# EAGLE board MicroViewUSB-GiantPanel-v02 (EAGLE 6.5.0), part 1 of 7
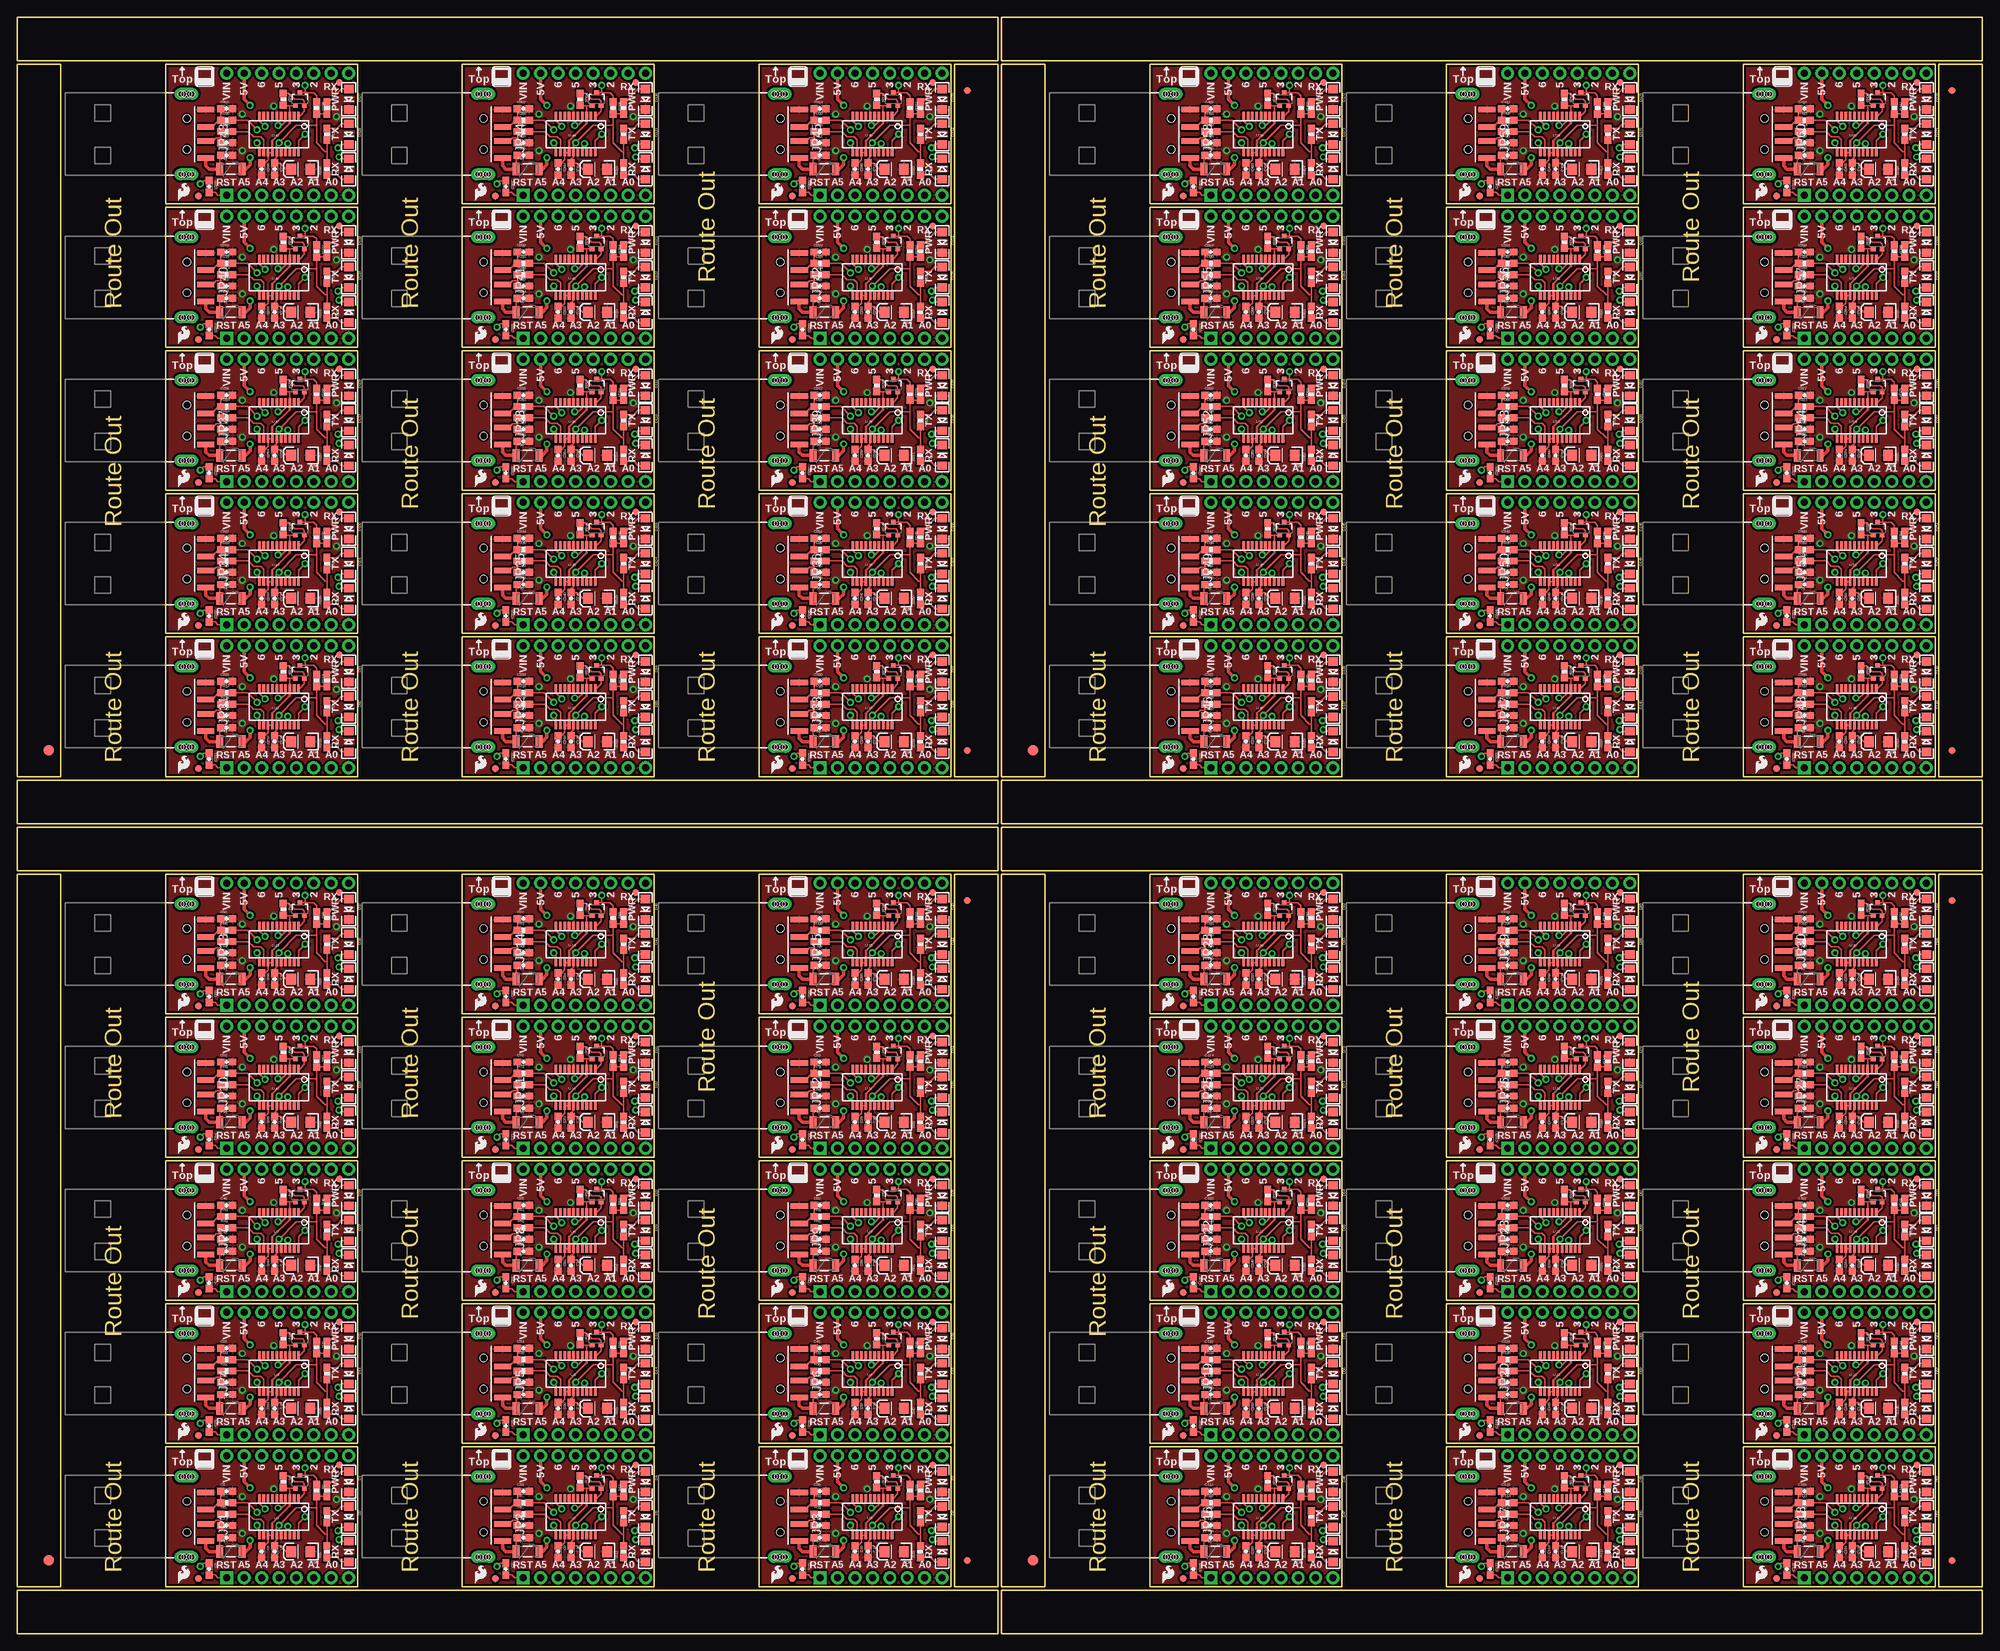
[diagram p0: board, top side]
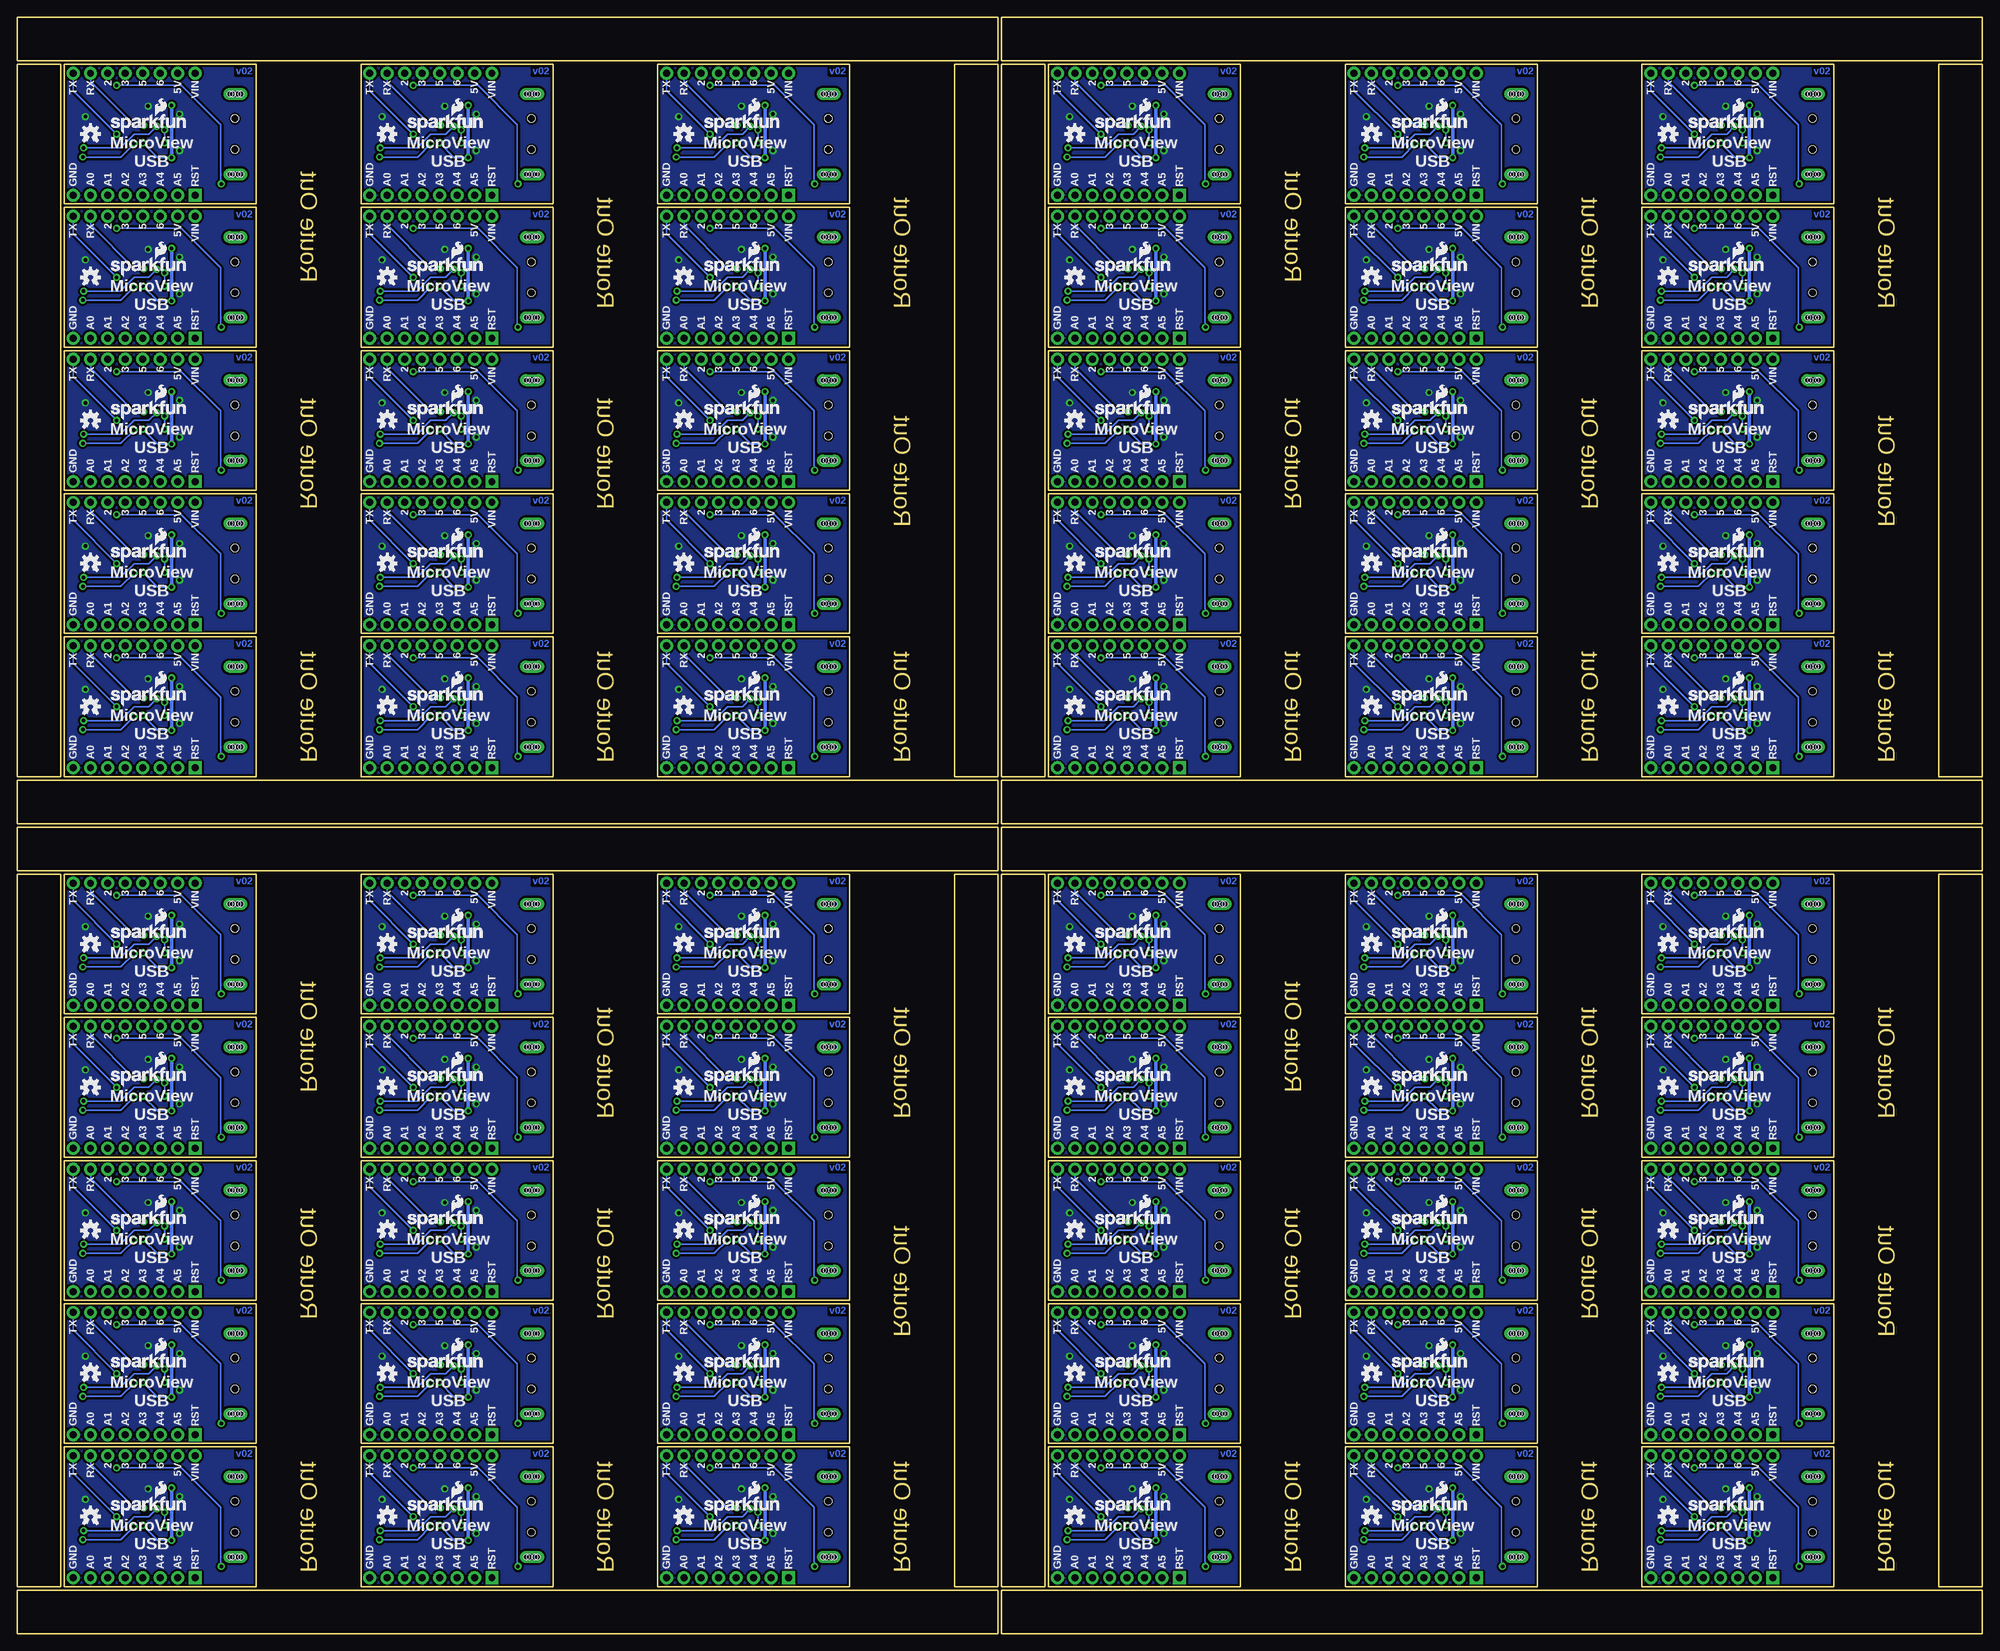
[diagram p1: board, bottom side, seen from below]

Size 286 x 235.2 mm. Coordinates in mm from the lower left corner, seen from the top.
Outline: 304 segments
Copper layers (1*16): Top 0.035mm / dielectric 1.5mm / Bottom 0.035mm
Design rules "SparkFun-2-layer": minimum track width 7mil, minimum drill 15mil, track to track 8mil, track to pad 8mil, pad to pad 8mil, via to via 8mil, smd to smd 8mil, copper to edge 8mil, drill to drill 8mil, minimum pad ring 12mil, minimum via ring 10mil, stop-mask expansion 4mil, vias tented up to drill 20mil, thermal gap 10mil
Net classes: 0 default: width 0.152 mm, drill 0.305 mm, clearance 0.152 mm

## Footprints (pad centres in the part's own frame; a part is rotated, then mirrored left to right if it is on the bottom)
0603-CAP = smd 1.1 x 1: 1 -0.85,0; 2 0.85,0
EIA3216 = smd 1.4 x 1.6: A 1.4,0; C -1.4,0
LED-1206 = smd 1.2 x 1.4: A -1.5,0; C 1.5,0
FIDUCIAL-1.5X3 = smd 1.5 x 1.5: 1 0,0
FIDUCIAL-1X2 = smd 1 x 1: 1 0,0
PTC-1206-WIDE = smd 1 x 1.8: 1 -1.654,0; 2 1.654,0
MV-DIP16-NODIMENSION = drill 1.016 pad 1.88 square: 1 0,0 | drill 1.016 pad 1.88: 2 2.54,0; 3 5.08,0; 4 7.62,0; 5 10.16,0; 6 12.7,0; 7 15.24,0; 8 17.78,0; 9 17.78,17.78; 10 15.24,17.78; 11 12.7,17.78; 12 10.16,17.78; 13 7.62,17.78; 14 5.08,17.78; 15 2.54,17.78; 16 0,17.78
USB-A-SMT-MALE = smd 0.8 x 2.5: D+1 1.027,-5.87; D-1 -1.027,-5.87; GND1 3.551,-5.87; VBUS1 -3.5,-5.87 | drill 0.8 pad 1.778 long: P$1 5.85,-3.05; P$3 -5.85,-3.05 | hole 1.1: 2.25,-3.12; -2.25,-3.12 | hole 0.8: -5.85,-3.45; -5.85,-3.85; -5.85,-2.65; -5.85,-2.25; 5.85,-3.45; 5.85,-3.85; 5.85,-2.65; 5.85,-2.25
SOT323 = smd 0.7 x 0.7: 1 -0.65,-0.925; 2 0.65,-0.925; 3 0,0.925
0603-RES = smd 1.1 x 1: 1 -0.85,0; 2 0.85,0
SSOP20_L = smd 0.381 x 1.143: 1 -2.857,-2.68; 2 -2.223,-2.68; 3 -1.587,-2.68; 4 -0.953,-2.68; 5 -0.318,-2.68; 6 0.318,-2.68; 7 0.953,-2.68; 8 1.587,-2.68; 9 2.223,-2.68; 10 2.857,-2.68; 11 2.857,2.68; 12 2.223,2.68; 13 1.587,2.68; 14 0.953,2.68; 15 0.318,2.68; 16 -0.318,2.68; 17 -0.953,2.68; 18 -1.587,2.68; 19 -2.223,2.68; 20 -2.857,2.68

## Placement (x,y rotation side)
C1  0.1uF  [0603-CAP]  30.48,13.97 0 top
C2  47pF  [0603-CAP]  30.48,15.75 0 top
C3  47pF  [0603-CAP]  30.48,20.7 0 top
C4  10uF  [EIA3216]  41.27,11.94 180 top
C5  0.1uF  [0603-CAP]  37.47,11.94 270 top
C6  0.1uF  [0603-CAP]  35.56,11.94 270 top
C7  0.1uF  [0603-CAP]  27.94,9.4 270 top
C8  0.1uF  [0603-CAP]  71.12,9.4 270 top
C9  0.1uF  [0603-CAP]  78.74,11.94 270 top
C10  0.1uF  [0603-CAP]  80.64,11.94 270 top
C11  0.1uF  [0603-CAP]  73.66,13.97 0 top
C12  47pF  [0603-CAP]  73.66,15.75 0 top
C13  47pF  [0603-CAP]  73.66,20.7 0 top
C14  10uF  [EIA3216]  84.45,11.94 180 top
C15  0.1uF  [0603-CAP]  114.3,9.4 270 top
C16  0.1uF  [0603-CAP]  121.92,11.94 270 top
C17  0.1uF  [0603-CAP]  123.83,11.94 270 top
C18  0.1uF  [0603-CAP]  116.84,13.97 0 top
C19  47pF  [0603-CAP]  116.84,15.75 0 top
C20  47pF  [0603-CAP]  116.84,20.7 0 top
C21  10uF  [EIA3216]  127.64,11.94 180 top
C22  0.1uF  [0603-CAP]  27.94,30.23 270 top
C23  0.1uF  [0603-CAP]  35.56,32.77 270 top
C24  0.1uF  [0603-CAP]  37.47,32.77 270 top
C25  0.1uF  [0603-CAP]  30.48,34.8 0 top
C26  47pF  [0603-CAP]  30.48,36.58 0 top
C27  47pF  [0603-CAP]  30.48,41.53 0 top
C28  10uF  [EIA3216]  41.27,32.77 180 top
C29  0.1uF  [0603-CAP]  71.12,30.23 270 top
C30  0.1uF  [0603-CAP]  78.74,32.77 270 top
C31  0.1uF  [0603-CAP]  80.64,32.77 270 top
C32  0.1uF  [0603-CAP]  73.66,34.8 0 top
C33  47pF  [0603-CAP]  73.66,36.58 0 top
C34  47pF  [0603-CAP]  73.66,41.53 0 top
C35  10uF  [EIA3216]  84.45,32.77 180 top
C36  0.1uF  [0603-CAP]  114.3,30.23 270 top
C37  0.1uF  [0603-CAP]  121.92,32.77 270 top
C38  0.1uF  [0603-CAP]  123.83,32.77 270 top
C39  0.1uF  [0603-CAP]  116.84,34.8 0 top
C40  47pF  [0603-CAP]  116.84,36.58 0 top
C41  47pF  [0603-CAP]  116.84,41.53 0 top
C42  10uF  [EIA3216]  127.64,32.77 180 top
C43  0.1uF  [0603-CAP]  27.94,51.05 270 top
C44  0.1uF  [0603-CAP]  35.56,53.59 270 top
C45  0.1uF  [0603-CAP]  37.47,53.59 270 top
C46  0.1uF  [0603-CAP]  30.48,55.63 0 top
C47  47pF  [0603-CAP]  30.48,57.4 0 top
C48  47pF  [0603-CAP]  30.48,62.36 0 top
C49  10uF  [EIA3216]  41.27,53.59 180 top
C50  0.1uF  [0603-CAP]  71.12,51.05 270 top
C51  0.1uF  [0603-CAP]  78.74,53.59 270 top
C52  0.1uF  [0603-CAP]  80.64,53.59 270 top
C53  0.1uF  [0603-CAP]  73.66,55.63 0 top
C54  47pF  [0603-CAP]  73.66,57.4 0 top
C55  47pF  [0603-CAP]  73.66,62.36 0 top
C56  10uF  [EIA3216]  84.45,53.59 180 top
C57  0.1uF  [0603-CAP]  114.3,51.05 270 top
C58  0.1uF  [0603-CAP]  121.92,53.59 270 top
C59  0.1uF  [0603-CAP]  123.83,53.59 270 top
C60  0.1uF  [0603-CAP]  116.84,55.63 0 top
C61  47pF  [0603-CAP]  116.84,57.4 0 top
C62  47pF  [0603-CAP]  116.84,62.36 0 top
C63  10uF  [EIA3216]  127.64,53.59 180 top
C64  0.1uF  [0603-CAP]  27.94,71.88 270 top
C65  0.1uF  [0603-CAP]  35.56,74.42 270 top
C66  0.1uF  [0603-CAP]  37.47,74.42 270 top
C67  0.1uF  [0603-CAP]  30.48,76.45 0 top
C68  47pF  [0603-CAP]  30.48,78.23 0 top
C69  47pF  [0603-CAP]  30.48,83.19 0 top
C70  10uF  [EIA3216]  41.27,74.42 180 top
C71  0.1uF  [0603-CAP]  71.12,71.88 270 top
C72  0.1uF  [0603-CAP]  78.74,74.42 270 top
C73  0.1uF  [0603-CAP]  80.64,74.42 270 top
C74  0.1uF  [0603-CAP]  73.66,76.45 0 top
C75  47pF  [0603-CAP]  73.66,78.23 0 top
C76  47pF  [0603-CAP]  73.66,83.19 0 top
C77  10uF  [EIA3216]  84.45,74.42 180 top
C78  0.1uF  [0603-CAP]  114.3,71.88 270 top
C79  0.1uF  [0603-CAP]  121.92,74.42 270 top
C80  0.1uF  [0603-CAP]  123.83,74.42 270 top
C81  0.1uF  [0603-CAP]  116.84,76.45 0 top
C82  47pF  [0603-CAP]  116.84,78.23 0 top
C83  47pF  [0603-CAP]  116.84,83.19 0 top
C84  10uF  [EIA3216]  127.64,74.42 180 top
C85  0.1uF  [0603-CAP]  27.94,92.71 270 top
C86  0.1uF  [0603-CAP]  35.56,95.25 270 top
C87  0.1uF  [0603-CAP]  37.47,95.25 270 top
C88  0.1uF  [0603-CAP]  30.48,97.28 0 top
C89  47pF  [0603-CAP]  30.48,99.06 0 top
C90  47pF  [0603-CAP]  30.48,104.01 0 top
C91  10uF  [EIA3216]  41.27,95.25 180 top
C92  0.1uF  [0603-CAP]  71.12,92.71 270 top
C93  0.1uF  [0603-CAP]  78.74,95.25 270 top
C94  0.1uF  [0603-CAP]  80.64,95.25 270 top
C95  0.1uF  [0603-CAP]  73.66,97.28 0 top
C96  47pF  [0603-CAP]  73.66,99.06 0 top
C97  47pF  [0603-CAP]  73.66,104.01 0 top
C98  10uF  [EIA3216]  84.45,95.25 180 top
C99  0.1uF  [0603-CAP]  114.3,92.71 270 top
C100  0.1uF  [0603-CAP]  121.92,95.25 270 top
C101  0.1uF  [0603-CAP]  123.83,95.25 270 top
C102  0.1uF  [0603-CAP]  116.84,97.28 0 top
C103  47pF  [0603-CAP]  116.84,99.06 0 top
C104  47pF  [0603-CAP]  116.84,104.01 0 top
C105  10uF  [EIA3216]  127.64,95.25 180 top
C106  0.1uF  [0603-CAP]  171.2,9.4 270 top
C107  0.1uF  [0603-CAP]  178.82,11.94 270 top
C108  0.1uF  [0603-CAP]  180.72,11.94 270 top
C109  0.1uF  [0603-CAP]  173.74,13.97 0 top
C110  47pF  [0603-CAP]  173.74,15.75 0 top
C111  47pF  [0603-CAP]  173.74,20.7 0 top
C112  10uF  [EIA3216]  184.53,11.94 180 top
C113  0.1uF  [0603-CAP]  214.38,9.4 270 top
C114  0.1uF  [0603-CAP]  222,11.94 270 top
C115  0.1uF  [0603-CAP]  223.9,11.94 270 top
C116  0.1uF  [0603-CAP]  216.92,13.97 0 top
C117  47pF  [0603-CAP]  216.92,15.75 0 top
C118  47pF  [0603-CAP]  216.92,20.7 0 top
C119  10uF  [EIA3216]  227.71,11.94 180 top
C120  0.1uF  [0603-CAP]  257.56,9.4 270 top
C121  0.1uF  [0603-CAP]  265.18,11.94 270 top
C122  0.1uF  [0603-CAP]  267.08,11.94 270 top
C123  0.1uF  [0603-CAP]  260.1,13.97 0 top
C124  47pF  [0603-CAP]  260.1,15.75 0 top
C125  47pF  [0603-CAP]  260.1,20.7 0 top
C126  10uF  [EIA3216]  270.89,11.94 180 top
C127  0.1uF  [0603-CAP]  171.2,30.23 270 top
C128  0.1uF  [0603-CAP]  178.82,32.77 270 top
C129  0.1uF  [0603-CAP]  180.72,32.77 270 top
C130  0.1uF  [0603-CAP]  173.74,34.8 0 top
C131  47pF  [0603-CAP]  173.74,36.58 0 top
C132  47pF  [0603-CAP]  173.74,41.53 0 top
C133  10uF  [EIA3216]  184.53,32.77 180 top
C134  0.1uF  [0603-CAP]  214.38,30.23 270 top
C135  0.1uF  [0603-CAP]  222,32.77 270 top
C136  0.1uF  [0603-CAP]  223.9,32.77 270 top
C137  0.1uF  [0603-CAP]  216.92,34.8 0 top
C138  47pF  [0603-CAP]  216.92,36.58 0 top
C139  47pF  [0603-CAP]  216.92,41.53 0 top
C140  10uF  [EIA3216]  227.71,32.77 180 top
C141  0.1uF  [0603-CAP]  257.56,30.23 270 top
C142  0.1uF  [0603-CAP]  265.18,32.77 270 top
C143  0.1uF  [0603-CAP]  267.08,32.77 270 top
C144  0.1uF  [0603-CAP]  260.1,34.8 0 top
C145  47pF  [0603-CAP]  260.1,36.58 0 top
C146  47pF  [0603-CAP]  260.1,41.53 0 top
C147  10uF  [EIA3216]  270.89,32.77 180 top
C148  0.1uF  [0603-CAP]  171.2,51.05 270 top
C149  0.1uF  [0603-CAP]  178.82,53.59 270 top
C150  0.1uF  [0603-CAP]  180.72,53.59 270 top
C151  0.1uF  [0603-CAP]  173.74,55.63 0 top
C152  47pF  [0603-CAP]  173.74,57.4 0 top
C153  47pF  [0603-CAP]  173.74,62.36 0 top
C154  10uF  [EIA3216]  184.53,53.59 180 top
C155  0.1uF  [0603-CAP]  214.38,51.05 270 top
C156  0.1uF  [0603-CAP]  222,53.59 270 top
C157  0.1uF  [0603-CAP]  223.9,53.59 270 top
C158  0.1uF  [0603-CAP]  216.92,55.63 0 top
C159  47pF  [0603-CAP]  216.92,57.4 0 top
C160  47pF  [0603-CAP]  216.92,62.36 0 top
C161  10uF  [EIA3216]  227.71,53.59 180 top
C162  0.1uF  [0603-CAP]  257.56,51.05 270 top
C163  0.1uF  [0603-CAP]  265.18,53.59 270 top
C164  0.1uF  [0603-CAP]  267.08,53.59 270 top
C165  0.1uF  [0603-CAP]  260.1,55.63 0 top
C166  47pF  [0603-CAP]  260.1,57.4 0 top
C167  47pF  [0603-CAP]  260.1,62.36 0 top
C168  10uF  [EIA3216]  270.89,53.59 180 top
C169  0.1uF  [0603-CAP]  171.2,71.88 270 top
C170  0.1uF  [0603-CAP]  178.82,74.42 270 top
C171  0.1uF  [0603-CAP]  180.72,74.42 270 top
C172  0.1uF  [0603-CAP]  173.74,76.45 0 top
C173  47pF  [0603-CAP]  173.74,78.23 0 top
C174  47pF  [0603-CAP]  173.74,83.19 0 top
C175  10uF  [EIA3216]  184.53,74.42 180 top
C176  0.1uF  [0603-CAP]  214.38,71.88 270 top
C177  0.1uF  [0603-CAP]  222,74.42 270 top
C178  0.1uF  [0603-CAP]  223.9,74.42 270 top
C179  0.1uF  [0603-CAP]  216.92,76.45 0 top
C180  47pF  [0603-CAP]  216.92,78.23 0 top
C181  47pF  [0603-CAP]  216.92,83.19 0 top
C182  10uF  [EIA3216]  227.71,74.42 180 top
C183  0.1uF  [0603-CAP]  257.56,71.88 270 top
C184  0.1uF  [0603-CAP]  265.18,74.42 270 top
C185  0.1uF  [0603-CAP]  267.08,74.42 270 top
C186  0.1uF  [0603-CAP]  260.1,76.45 0 top
C187  47pF  [0603-CAP]  260.1,78.23 0 top
C188  47pF  [0603-CAP]  260.1,83.19 0 top
C189  10uF  [EIA3216]  270.89,74.42 180 top
C190  0.1uF  [0603-CAP]  171.2,92.71 270 top
C191  0.1uF  [0603-CAP]  178.82,95.25 270 top
C192  0.1uF  [0603-CAP]  180.72,95.25 270 top
C193  0.1uF  [0603-CAP]  173.74,97.28 0 top
C194  47pF  [0603-CAP]  173.74,99.06 0 top
C195  47pF  [0603-CAP]  173.74,104.01 0 top
C196  10uF  [EIA3216]  184.53,95.25 180 top
C197  0.1uF  [0603-CAP]  214.38,92.71 270 top
C198  0.1uF  [0603-CAP]  222,95.25 270 top
C199  0.1uF  [0603-CAP]  223.9,95.25 270 top
C200  0.1uF  [0603-CAP]  216.92,97.28 0 top
C201  47pF  [0603-CAP]  216.92,99.06 0 top
C202  47pF  [0603-CAP]  216.92,104.01 0 top
C203  10uF  [EIA3216]  227.71,95.25 180 top
C204  0.1uF  [0603-CAP]  257.56,92.71 270 top
C205  0.1uF  [0603-CAP]  265.18,95.25 270 top
C206  0.1uF  [0603-CAP]  267.08,95.25 270 top
C207  0.1uF  [0603-CAP]  260.1,97.28 0 top
C208  47pF  [0603-CAP]  260.1,99.06 0 top
C209  47pF  [0603-CAP]  260.1,104.01 0 top
C210  10uF  [EIA3216]  270.89,95.25 180 top
C211  0.1uF  [0603-CAP]  27.94,127.25 270 top
C212  0.1uF  [0603-CAP]  35.56,129.79 270 top
C213  0.1uF  [0603-CAP]  37.47,129.79 270 top
C214  0.1uF  [0603-CAP]  30.48,131.83 0 top
C215  47pF  [0603-CAP]  30.48,133.6 0 top
C216  47pF  [0603-CAP]  30.48,138.56 0 top
C217  10uF  [EIA3216]  41.27,129.79 180 top
C218  0.1uF  [0603-CAP]  71.12,127.25 270 top
C219  0.1uF  [0603-CAP]  78.74,129.79 270 top
C220  0.1uF  [0603-CAP]  80.64,129.79 270 top
C221  0.1uF  [0603-CAP]  73.66,131.83 0 top
C222  47pF  [0603-CAP]  73.66,133.6 0 top
C223  47pF  [0603-CAP]  73.66,138.56 0 top
C224  10uF  [EIA3216]  84.45,129.79 180 top
C225  0.1uF  [0603-CAP]  114.3,127.25 270 top
C226  0.1uF  [0603-CAP]  121.92,129.79 270 top
C227  0.1uF  [0603-CAP]  123.83,129.79 270 top
C228  0.1uF  [0603-CAP]  116.84,131.83 0 top
C229  47pF  [0603-CAP]  116.84,133.6 0 top
C230  47pF  [0603-CAP]  116.84,138.56 0 top
C231  10uF  [EIA3216]  127.64,129.79 180 top
C232  0.1uF  [0603-CAP]  27.94,148.08 270 top
C233  0.1uF  [0603-CAP]  35.56,150.62 270 top
C234  0.1uF  [0603-CAP]  37.47,150.62 270 top
C235  0.1uF  [0603-CAP]  30.48,152.65 0 top
C236  47pF  [0603-CAP]  30.48,154.43 0 top
C237  47pF  [0603-CAP]  30.48,159.38 0 top
C238  10uF  [EIA3216]  41.27,150.62 180 top
C239  0.1uF  [0603-CAP]  71.12,148.08 270 top
C240  0.1uF  [0603-CAP]  78.74,150.62 270 top
C241  0.1uF  [0603-CAP]  80.64,150.62 270 top
C242  0.1uF  [0603-CAP]  73.66,152.65 0 top
C243  47pF  [0603-CAP]  73.66,154.43 0 top
C244  47pF  [0603-CAP]  73.66,159.38 0 top
C245  10uF  [EIA3216]  84.45,150.62 180 top
C246  0.1uF  [0603-CAP]  114.3,148.08 270 top
C247  0.1uF  [0603-CAP]  121.92,150.62 270 top
C248  0.1uF  [0603-CAP]  123.83,150.62 270 top
C249  0.1uF  [0603-CAP]  116.84,152.65 0 top
C250  47pF  [0603-CAP]  116.84,154.43 0 top
C251  47pF  [0603-CAP]  116.84,159.38 0 top
C252  10uF  [EIA3216]  127.64,150.62 180 top
C253  0.1uF  [0603-CAP]  27.94,168.91 270 top
C254  0.1uF  [0603-CAP]  35.56,171.45 270 top
C255  0.1uF  [0603-CAP]  37.47,171.45 270 top
C256  0.1uF  [0603-CAP]  30.48,173.48 0 top
C257  47pF  [0603-CAP]  30.48,175.26 0 top
C258  47pF  [0603-CAP]  30.48,180.21 0 top
C259  10uF  [EIA3216]  41.27,171.45 180 top
C260  0.1uF  [0603-CAP]  71.12,168.91 270 top
C261  0.1uF  [0603-CAP]  78.74,171.45 270 top
C262  0.1uF  [0603-CAP]  80.64,171.45 270 top
C263  0.1uF  [0603-CAP]  73.66,173.48 0 top
C264  47pF  [0603-CAP]  73.66,175.26 0 top
C265  47pF  [0603-CAP]  73.66,180.21 0 top
C266  10uF  [EIA3216]  84.45,171.45 180 top
C267  0.1uF  [0603-CAP]  114.3,168.91 270 top
C268  0.1uF  [0603-CAP]  121.92,171.45 270 top
C269  0.1uF  [0603-CAP]  123.83,171.45 270 top
C270  0.1uF  [0603-CAP]  116.84,173.48 0 top
C271  47pF  [0603-CAP]  116.84,175.26 0 top
C272  47pF  [0603-CAP]  116.84,180.21 0 top
C273  10uF  [EIA3216]  127.64,171.45 180 top
C274  0.1uF  [0603-CAP]  27.94,189.74 270 top
C275  0.1uF  [0603-CAP]  35.56,192.28 270 top
C276  0.1uF  [0603-CAP]  37.47,192.28 270 top
C277  0.1uF  [0603-CAP]  30.48,194.31 0 top
C278  47pF  [0603-CAP]  30.48,196.09 0 top
C279  47pF  [0603-CAP]  30.48,201.04 0 top
C280  10uF  [EIA3216]  41.27,192.28 180 top
C281  0.1uF  [0603-CAP]  71.12,189.74 270 top
C282  0.1uF  [0603-CAP]  78.74,192.28 270 top
C283  0.1uF  [0603-CAP]  80.64,192.28 270 top
C284  0.1uF  [0603-CAP]  73.66,194.31 0 top
C285  47pF  [0603-CAP]  73.66,196.09 0 top
C286  47pF  [0603-CAP]  73.66,201.04 0 top
C287  10uF  [EIA3216]  84.45,192.28 180 top
C288  0.1uF  [0603-CAP]  114.3,189.74 270 top
C289  0.1uF  [0603-CAP]  121.92,192.28 270 top
C290  0.1uF  [0603-CAP]  123.83,192.28 270 top
C291  0.1uF  [0603-CAP]  116.84,194.31 0 top
C292  47pF  [0603-CAP]  116.84,196.09 0 top
C293  47pF  [0603-CAP]  116.84,201.04 0 top
C294  10uF  [EIA3216]  127.64,192.28 180 top
C295  0.1uF  [0603-CAP]  27.94,210.57 270 top
C296  0.1uF  [0603-CAP]  35.56,213.11 270 top
C297  0.1uF  [0603-CAP]  37.47,213.11 270 top
C298  0.1uF  [0603-CAP]  30.48,215.14 0 top
C299  47pF  [0603-CAP]  30.48,216.92 0 top
C300  47pF  [0603-CAP]  30.48,221.87 0 top
C301  10uF  [EIA3216]  41.27,213.11 180 top
C302  0.1uF  [0603-CAP]  71.12,210.57 270 top
C303  0.1uF  [0603-CAP]  78.74,213.11 270 top
C304  0.1uF  [0603-CAP]  80.64,213.11 270 top
C305  0.1uF  [0603-CAP]  73.66,215.14 0 top
C306  47pF  [0603-CAP]  73.66,216.92 0 top
C307  47pF  [0603-CAP]  73.66,221.87 0 top
C308  10uF  [EIA3216]  84.45,213.11 180 top
C309  0.1uF  [0603-CAP]  114.3,210.57 270 top
C310  0.1uF  [0603-CAP]  121.92,213.11 270 top
C311  0.1uF  [0603-CAP]  123.83,213.11 270 top
C312  0.1uF  [0603-CAP]  116.84,215.14 0 top
C313  47pF  [0603-CAP]  116.84,216.92 0 top
C314  47pF  [0603-CAP]  116.84,221.87 0 top
C315  10uF  [EIA3216]  127.64,213.11 180 top
C316  0.1uF  [0603-CAP]  171.2,127.25 270 top
C317  0.1uF  [0603-CAP]  178.82,129.79 270 top
C318  0.1uF  [0603-CAP]  180.72,129.79 270 top
C319  0.1uF  [0603-CAP]  173.74,131.83 0 top
C320  47pF  [0603-CAP]  173.74,133.6 0 top
C321  47pF  [0603-CAP]  173.74,138.56 0 top
C322  10uF  [EIA3216]  184.53,129.79 180 top
C323  0.1uF  [0603-CAP]  214.38,127.25 270 top
C324  0.1uF  [0603-CAP]  222,129.79 270 top
C325  0.1uF  [0603-CAP]  223.9,129.79 270 top
C326  0.1uF  [0603-CAP]  216.92,131.83 0 top
C327  47pF  [0603-CAP]  216.92,133.6 0 top
C328  47pF  [0603-CAP]  216.92,138.56 0 top
C329  10uF  [EIA3216]  227.71,129.79 180 top
C330  0.1uF  [0603-CAP]  257.56,127.25 270 top
C331  0.1uF  [0603-CAP]  265.18,129.79 270 top
C332  0.1uF  [0603-CAP]  267.08,129.79 270 top
C333  0.1uF  [0603-CAP]  260.1,131.83 0 top
C334  47pF  [0603-CAP]  260.1,133.6 0 top
C335  47pF  [0603-CAP]  260.1,138.56 0 top
C336  10uF  [EIA3216]  270.89,129.79 180 top
C337  0.1uF  [0603-CAP]  171.2,148.08 270 top
C338  0.1uF  [0603-CAP]  178.82,150.62 270 top
C339  0.1uF  [0603-CAP]  180.72,150.62 270 top
C340  0.1uF  [0603-CAP]  173.74,152.65 0 top
C341  47pF  [0603-CAP]  173.74,154.43 0 top
C342  47pF  [0603-CAP]  173.74,159.38 0 top
C343  10uF  [EIA3216]  184.53,150.62 180 top
C344  0.1uF  [0603-CAP]  214.38,148.08 270 top
C345  0.1uF  [0603-CAP]  222,150.62 270 top
C346  0.1uF  [0603-CAP]  223.9,150.62 270 top
C347  0.1uF  [0603-CAP]  216.92,152.65 0 top
C348  47pF  [0603-CAP]  216.92,154.43 0 top
C349  47pF  [0603-CAP]  216.92,159.38 0 top
C350  10uF  [EIA3216]  227.71,150.62 180 top
C351  0.1uF  [0603-CAP]  257.56,148.08 270 top
C352  0.1uF  [0603-CAP]  265.18,150.62 270 top
C353  0.1uF  [0603-CAP]  267.08,150.62 270 top
C354  0.1uF  [0603-CAP]  260.1,152.65 0 top
C355  47pF  [0603-CAP]  260.1,154.43 0 top
C356  47pF  [0603-CAP]  260.1,159.38 0 top
C357  10uF  [EIA3216]  270.89,150.62 180 top
C358  0.1uF  [0603-CAP]  171.2,168.91 270 top
C359  0.1uF  [0603-CAP]  178.82,171.45 270 top
C360  0.1uF  [0603-CAP]  180.72,171.45 270 top
C361  0.1uF  [0603-CAP]  173.74,173.48 0 top
C362  47pF  [0603-CAP]  173.74,175.26 0 top
C363  47pF  [0603-CAP]  173.74,180.21 0 top
C364  10uF  [EIA3216]  184.53,171.45 180 top
C365  0.1uF  [0603-CAP]  214.38,168.91 270 top
C366  0.1uF  [0603-CAP]  222,171.45 270 top
C367  0.1uF  [0603-CAP]  223.9,171.45 270 top
C368  0.1uF  [0603-CAP]  216.92,173.48 0 top
C369  47pF  [0603-CAP]  216.92,175.26 0 top
C370  47pF  [0603-CAP]  216.92,180.21 0 top
C371  10uF  [EIA3216]  227.71,171.45 180 top
C372  0.1uF  [0603-CAP]  257.56,168.91 270 top
C373  0.1uF  [0603-CAP]  265.18,171.45 270 top
C374  0.1uF  [0603-CAP]  267.08,171.45 270 top
C375  0.1uF  [0603-CAP]  260.1,173.48 0 top
C376  47pF  [0603-CAP]  260.1,175.26 0 top
C377  47pF  [0603-CAP]  260.1,180.21 0 top
C378  10uF  [EIA3216]  270.89,171.45 180 top
C379  0.1uF  [0603-CAP]  171.2,189.74 270 top
C380  0.1uF  [0603-CAP]  178.82,192.28 270 top
C381  0.1uF  [0603-CAP]  180.72,192.28 270 top
C382  0.1uF  [0603-CAP]  173.74,194.31 0 top
C383  47pF  [0603-CAP]  173.74,196.09 0 top
C384  47pF  [0603-CAP]  173.74,201.04 0 top
C385  10uF  [EIA3216]  184.53,192.28 180 top
C386  0.1uF  [0603-CAP]  214.38,189.74 270 top
C387  0.1uF  [0603-CAP]  222,192.28 270 top
C388  0.1uF  [0603-CAP]  223.9,192.28 270 top
C389  0.1uF  [0603-CAP]  216.92,194.31 0 top
C390  47pF  [0603-CAP]  216.92,196.09 0 top
C391  47pF  [0603-CAP]  216.92,201.04 0 top
C392  10uF  [EIA3216]  227.71,192.28 180 top
C393  0.1uF  [0603-CAP]  257.56,189.74 270 top
C394  0.1uF  [0603-CAP]  265.18,192.28 270 top
C395  0.1uF  [0603-CAP]  267.08,192.28 270 top
C396  0.1uF  [0603-CAP]  260.1,194.31 0 top
C397  47pF  [0603-CAP]  260.1,196.09 0 top
C398  47pF  [0603-CAP]  260.1,201.04 0 top
C399  10uF  [EIA3216]  270.89,192.28 180 top
C400  0.1uF  [0603-CAP]  171.2,210.57 270 top
C401  0.1uF  [0603-CAP]  178.82,213.11 270 top
C402  0.1uF  [0603-CAP]  180.72,213.11 270 top
C403  0.1uF  [0603-CAP]  173.74,215.14 0 top
C404  47pF  [0603-CAP]  173.74,216.92 0 top
C405  47pF  [0603-CAP]  173.74,221.87 0 top
C406  10uF  [EIA3216]  184.53,213.11 180 top
C407  0.1uF  [0603-CAP]  214.38,210.57 270 top
C408  0.1uF  [0603-CAP]  222,213.11 270 top
C409  0.1uF  [0603-CAP]  223.9,213.11 270 top
C410  0.1uF  [0603-CAP]  216.92,215.14 0 top
C411  47pF  [0603-CAP]  216.92,216.92 0 top
C412  47pF  [0603-CAP]  216.92,221.87 0 top
C413  10uF  [EIA3216]  227.71,213.11 180 top
C414  0.1uF  [0603-CAP]  257.56,210.57 270 top
C415  0.1uF  [0603-CAP]  265.18,213.11 270 top
C416  0.1uF  [0603-CAP]  267.08,213.11 270 top
C417  0.1uF  [0603-CAP]  260.1,215.14 0 top
C418  47pF  [0603-CAP]  260.1,216.92 0 top
C419  47pF  [0603-CAP]  260.1,221.87 0 top
C420  10uF  [EIA3216]  270.89,213.11 180 top
D1  GREEN  [LED-1206]  48.26,22.1 270 top
D2  RED  [LED-1206]  48.26,17.02 270 top
D3  Yellow  [LED-1206]  48.26,11.94 90 top
D4  GREEN  [LED-1206]  91.44,22.1 270 top
D5  RED  [LED-1206]  91.44,17.02 270 top
D6  Yellow  [LED-1206]  91.44,11.94 90 top
D7  GREEN  [LED-1206]  134.62,22.1 270 top
D8  RED  [LED-1206]  134.62,17.02 270 top
D9  Yellow  [LED-1206]  134.62,11.94 90 top
D10  GREEN  [LED-1206]  48.26,42.93 270 top
D11  RED  [LED-1206]  48.26,37.85 270 top
D12  Yellow  [LED-1206]  48.26,32.77 90 top
D13  GREEN  [LED-1206]  91.44,42.93 270 top
D14  RED  [LED-1206]  91.44,37.85 270 top
D15  Yellow  [LED-1206]  91.44,32.77 90 top
D16  GREEN  [LED-1206]  134.62,42.93 270 top
D17  RED  [LED-1206]  134.62,37.85 270 top
D18  Yellow  [LED-1206]  134.62,32.77 90 top
D19  GREEN  [LED-1206]  48.26,63.75 270 top
D20  RED  [LED-1206]  48.26,58.67 270 top
D21  Yellow  [LED-1206]  48.26,53.59 90 top
D22  GREEN  [LED-1206]  91.44,63.75 270 top
D23  RED  [LED-1206]  91.44,58.67 270 top
D24  Yellow  [LED-1206]  91.44,53.59 90 top
D25  GREEN  [LED-1206]  134.62,63.75 270 top
D26  RED  [LED-1206]  134.62,58.67 270 top
D27  Yellow  [LED-1206]  134.62,53.59 90 top
D28  GREEN  [LED-1206]  48.26,84.58 270 top
D29  RED  [LED-1206]  48.26,79.5 270 top
D30  Yellow  [LED-1206]  48.26,74.42 90 top
D31  GREEN  [LED-1206]  91.44,84.58 270 top
D32  RED  [LED-1206]  91.44,79.5 270 top
D33  Yellow  [LED-1206]  91.44,74.42 90 top
D34  GREEN  [LED-1206]  134.62,84.58 270 top
D35  RED  [LED-1206]  134.62,79.5 270 top
D36  Yellow  [LED-1206]  134.62,74.42 90 top
D37  GREEN  [LED-1206]  48.26,105.41 270 top
D38  RED  [LED-1206]  48.26,100.33 270 top
D39  Yellow  [LED-1206]  48.26,95.25 90 top
D40  GREEN  [LED-1206]  91.44,105.41 270 top
D41  RED  [LED-1206]  91.44,100.33 270 top
D42  Yellow  [LED-1206]  91.44,95.25 90 top
D43  GREEN  [LED-1206]  134.62,105.41 270 top
D44  RED  [LED-1206]  134.62,100.33 270 top
D45  Yellow  [LED-1206]  134.62,95.25 90 top
D46  GREEN  [LED-1206]  191.52,22.1 270 top
D47  RED  [LED-1206]  191.52,17.02 270 top
D48  Yellow  [LED-1206]  191.52,11.94 90 top
D49  GREEN  [LED-1206]  234.7,22.1 270 top
D50  RED  [LED-1206]  234.7,17.02 270 top
D51  Yellow  [LED-1206]  234.7,11.94 90 top
D52  GREEN  [LED-1206]  277.88,22.1 270 top
D53  RED  [LED-1206]  277.88,17.02 270 top
D54  Yellow  [LED-1206]  277.88,11.94 90 top
D55  GREEN  [LED-1206]  191.52,42.93 270 top
D56  RED  [LED-1206]  191.52,37.85 270 top
D57  Yellow  [LED-1206]  191.52,32.77 90 top
D58  GREEN  [LED-1206]  234.7,42.93 270 top
D59  RED  [LED-1206]  234.7,37.85 270 top
D60  Yellow  [LED-1206]  234.7,32.77 90 top
D61  GREEN  [LED-1206]  277.88,42.93 270 top
D62  RED  [LED-1206]  277.88,37.85 270 top
D63  Yellow  [LED-1206]  277.88,32.77 90 top
D64  GREEN  [LED-1206]  191.52,63.75 270 top
D65  RED  [LED-1206]  191.52,58.67 270 top
D66  Yellow  [LED-1206]  191.52,53.59 90 top
D67  GREEN  [LED-1206]  234.7,63.75 270 top
D68  RED  [LED-1206]  234.7,58.67 270 top
D69  Yellow  [LED-1206]  234.7,53.59 90 top
D70  GREEN  [LED-1206]  277.88,63.75 270 top
D71  RED  [LED-1206]  277.88,58.67 270 top
D72  Yellow  [LED-1206]  277.88,53.59 90 top
D73  GREEN  [LED-1206]  191.52,84.58 270 top
D74  RED  [LED-1206]  191.52,79.5 270 top
D75  Yellow  [LED-1206]  191.52,74.42 90 top
D76  GREEN  [LED-1206]  234.7,84.58 270 top
D77  RED  [LED-1206]  234.7,79.5 270 top
D78  Yellow  [LED-1206]  234.7,74.42 90 top
D79  GREEN  [LED-1206]  277.88,84.58 270 top
D80  RED  [LED-1206]  277.88,79.5 270 top
D81  Yellow  [LED-1206]  277.88,74.42 90 top
D82  GREEN  [LED-1206]  191.52,105.41 270 top
D83  RED  [LED-1206]  191.52,100.33 270 top
D84  Yellow  [LED-1206]  191.52,95.25 90 top
D85  GREEN  [LED-1206]  234.7,105.41 270 top
D86  RED  [LED-1206]  234.7,100.33 270 top
D87  Yellow  [LED-1206]  234.7,95.25 90 top
D88  GREEN  [LED-1206]  277.88,105.41 270 top
D89  RED  [LED-1206]  277.88,100.33 270 top
D90  Yellow  [LED-1206]  277.88,95.25 90 top
D91  GREEN  [LED-1206]  48.26,139.95 270 top
D92  RED  [LED-1206]  48.26,134.87 270 top
D93  Yellow  [LED-1206]  48.26,129.79 90 top
D94  GREEN  [LED-1206]  91.44,139.95 270 top
D95  RED  [LED-1206]  91.44,134.87 270 top
D96  Yellow  [LED-1206]  91.44,129.79 90 top
D97  GREEN  [LED-1206]  134.62,139.95 270 top
D98  RED  [LED-1206]  134.62,134.87 270 top
D99  Yellow  [LED-1206]  134.62,129.79 90 top
D100  GREEN  [LED-1206]  48.26,160.78 270 top
D101  RED  [LED-1206]  48.26,155.7 270 top
D102  Yellow  [LED-1206]  48.26,150.62 90 top
D103  GREEN  [LED-1206]  91.44,160.78 270 top
D104  RED  [LED-1206]  91.44,155.7 270 top
D105  Yellow  [LED-1206]  91.44,150.62 90 top
D106  GREEN  [LED-1206]  134.62,160.78 270 top
D107  RED  [LED-1206]  134.62,155.7 270 top
D108  Yellow  [LED-1206]  134.62,150.62 90 top
D109  GREEN  [LED-1206]  48.26,181.61 270 top
D110  RED  [LED-1206]  48.26,176.53 270 top
D111  Yellow  [LED-1206]  48.26,171.45 90 top
D112  GREEN  [LED-1206]  91.44,181.61 270 top
D113  RED  [LED-1206]  91.44,176.53 270 top
D114  Yellow  [LED-1206]  91.44,171.45 90 top
D115  GREEN  [LED-1206]  134.62,181.61 270 top
D116  RED  [LED-1206]  134.62,176.53 270 top
D117  Yellow  [LED-1206]  134.62,171.45 90 top
D118  GREEN  [LED-1206]  48.26,202.44 270 top
D119  RED  [LED-1206]  48.26,197.36 270 top
D120  Yellow  [LED-1206]  48.26,192.28 90 top
D121  GREEN  [LED-1206]  91.44,202.44 270 top
D122  RED  [LED-1206]  91.44,197.36 270 top
D123  Yellow  [LED-1206]  91.44,192.28 90 top
D124  GREEN  [LED-1206]  134.62,202.44 270 top
D125  RED  [LED-1206]  134.62,197.36 270 top
D126  Yellow  [LED-1206]  134.62,192.28 90 top
D127  GREEN  [LED-1206]  48.26,223.27 270 top
D128  RED  [LED-1206]  48.26,218.19 270 top
D129  Yellow  [LED-1206]  48.26,213.11 90 top
D130  GREEN  [LED-1206]  91.44,223.27 270 top
D131  RED  [LED-1206]  91.44,218.19 270 top
D132  Yellow  [LED-1206]  91.44,213.11 90 top
D133  GREEN  [LED-1206]  134.62,223.27 270 top
D134  RED  [LED-1206]  134.62,218.19 270 top
D135  Yellow  [LED-1206]  134.62,213.11 90 top
D136  GREEN  [LED-1206]  191.52,139.95 270 top
D137  RED  [LED-1206]  191.52,134.87 270 top
D138  Yellow  [LED-1206]  191.52,129.79 90 top
D139  GREEN  [LED-1206]  234.7,139.95 270 top
D140  RED  [LED-1206]  234.7,134.87 270 top
D141  Yellow  [LED-1206]  234.7,129.79 90 top
D142  GREEN  [LED-1206]  277.88,139.95 270 top
D143  RED  [LED-1206]  277.88,134.87 270 top
D144  Yellow  [LED-1206]  277.88,129.79 90 top
D145  GREEN  [LED-1206]  191.52,160.78 270 top
D146  RED  [LED-1206]  191.52,155.7 270 top
D147  Yellow  [LED-1206]  191.52,150.62 90 top
D148  GREEN  [LED-1206]  234.7,160.78 270 top
D149  RED  [LED-1206]  234.7,155.7 270 top
D150  Yellow  [LED-1206]  234.7,150.62 90 top
D151  GREEN  [LED-1206]  277.88,160.78 270 top
D152  RED  [LED-1206]  277.88,155.7 270 top
D153  Yellow  [LED-1206]  277.88,150.62 90 top
D154  GREEN  [LED-1206]  191.52,181.61 270 top
D155  RED  [LED-1206]  191.52,176.53 270 top
D156  Yellow  [LED-1206]  191.52,171.45 90 top
D157  GREEN  [LED-1206]  234.7,181.61 270 top
D158  RED  [LED-1206]  234.7,176.53 270 top
D159  Yellow  [LED-1206]  234.7,171.45 90 top
D160  GREEN  [LED-1206]  277.88,181.61 270 top
D161  RED  [LED-1206]  277.88,176.53 270 top
D162  Yellow  [LED-1206]  277.88,171.45 90 top
D163  GREEN  [LED-1206]  191.52,202.44 270 top
D164  RED  [LED-1206]  191.52,197.36 270 top
D165  Yellow  [LED-1206]  191.52,192.28 90 top
D166  GREEN  [LED-1206]  234.7,202.44 270 top
D167  RED  [LED-1206]  234.7,197.36 270 top
D168  Yellow  [LED-1206]  234.7,192.28 90 top
D169  GREEN  [LED-1206]  277.88,202.44 270 top
D170  RED  [LED-1206]  277.88,197.36 270 top
D171  Yellow  [LED-1206]  277.88,192.28 90 top
D172  GREEN  [LED-1206]  191.52,223.27 270 top
D173  RED  [LED-1206]  191.52,218.19 270 top
D174  Yellow  [LED-1206]  191.52,213.11 90 top
D175  GREEN  [LED-1206]  234.7,223.27 270 top
D176  RED  [LED-1206]  234.7,218.19 270 top
D177  Yellow  [LED-1206]  234.7,213.11 90 top
D178  GREEN  [LED-1206]  277.88,223.27 270 top
D179  RED  [LED-1206]  277.88,218.19 270 top
D180  Yellow  [LED-1206]  277.88,213.11 90 top
E$1  [FIDUCIAL-1.5X3]  4.57,10.67 0 top
E$2  [FIDUCIAL-1X2]  281.56,106.68 180 top
E$3  [FIDUCIAL-1X2]  281.56,10.67 0 top
E$4  [FIDUCIAL-1.5X3]  147.83,10.67 0 top
E$5  [FIDUCIAL-1X2]  138.3,224.54 180 top
E$6  [FIDUCIAL-1X2]  138.3,106.68 180 top
E$7  [FIDUCIAL-1X2]  138.3,128.52 0 top
E$8  [FIDUCIAL-1X2]  138.3,10.67 0 top
E$9  [FIDUCIAL-1.5X3]  4.57,128.52 0 top
E$10  [FIDUCIAL-1X2]  281.56,224.54 180 top
E$11  [FIDUCIAL-1X2]  281.56,128.52 0 top
E$12  [FIDUCIAL-1.5X3]  147.83,128.52 0 top
F1  500mA  [PTC-1206-WIDE]  31.11,11.94 0 top
F2  500mA  [PTC-1206-WIDE]  74.3,11.94 0 top
F3  500mA  [PTC-1206-WIDE]  117.47,11.94 0 top
F4  500mA  [PTC-1206-WIDE]  31.11,32.77 0 top
F5  500mA  [PTC-1206-WIDE]  74.3,32.77 0 top
F6  500mA  [PTC-1206-WIDE]  117.47,32.77 0 top
F7  500mA  [PTC-1206-WIDE]  31.11,53.59 0 top
F8  500mA  [PTC-1206-WIDE]  74.3,53.59 0 top
F9  500mA  [PTC-1206-WIDE]  117.47,53.59 0 top
F10  500mA  [PTC-1206-WIDE]  31.11,74.42 0 top
F11  500mA  [PTC-1206-WIDE]  74.3,74.42 0 top
F12  500mA  [PTC-1206-WIDE]  117.47,74.42 0 top
F13  500mA  [PTC-1206-WIDE]  31.11,95.25 0 top
F14  500mA  [PTC-1206-WIDE]  74.3,95.25 0 top
F15  500mA  [PTC-1206-WIDE]  117.47,95.25 0 top
F16  500mA  [PTC-1206-WIDE]  174.37,11.94 0 top
F17  500mA  [PTC-1206-WIDE]  217.55,11.94 0 top
F18  500mA  [PTC-1206-WIDE]  260.73,11.94 0 top
F19  500mA  [PTC-1206-WIDE]  174.37,32.77 0 top
F20  500mA  [PTC-1206-WIDE]  217.55,32.77 0 top
F21  500mA  [PTC-1206-WIDE]  260.73,32.77 0 top
F22  500mA  [PTC-1206-WIDE]  174.37,53.59 0 top
F23  500mA  [PTC-1206-WIDE]  217.55,53.59 0 top
F24  500mA  [PTC-1206-WIDE]  260.73,53.59 0 top
F25  500mA  [PTC-1206-WIDE]  174.37,74.42 0 top
F26  500mA  [PTC-1206-WIDE]  217.55,74.42 0 top
F27  500mA  [PTC-1206-WIDE]  260.73,74.42 0 top
F28  500mA  [PTC-1206-WIDE]  174.37,95.25 0 top
F29  500mA  [PTC-1206-WIDE]  217.55,95.25 0 top
F30  500mA  [PTC-1206-WIDE]  260.73,95.25 0 top
F31  500mA  [PTC-1206-WIDE]  31.11,129.79 0 top
F32  500mA  [PTC-1206-WIDE]  74.3,129.79 0 top
F33  500mA  [PTC-1206-WIDE]  117.47,129.79 0 top
F34  500mA  [PTC-1206-WIDE]  31.11,150.62 0 top
F35  500mA  [PTC-1206-WIDE]  74.3,150.62 0 top
F36  500mA  [PTC-1206-WIDE]  117.47,150.62 0 top
F37  500mA  [PTC-1206-WIDE]  31.11,171.45 0 top
F38  500mA  [PTC-1206-WIDE]  74.3,171.45 0 top
F39  500mA  [PTC-1206-WIDE]  117.47,171.45 0 top
F40  500mA  [PTC-1206-WIDE]  31.11,192.28 0 top
F41  500mA  [PTC-1206-WIDE]  74.3,192.28 0 top
F42  500mA  [PTC-1206-WIDE]  117.47,192.28 0 top
F43  500mA  [PTC-1206-WIDE]  31.11,213.11 0 top
F44  500mA  [PTC-1206-WIDE]  74.3,213.11 0 top
F45  500mA  [PTC-1206-WIDE]  117.47,213.11 0 top
F46  500mA  [PTC-1206-WIDE]  174.37,129.79 0 top
F47  500mA  [PTC-1206-WIDE]  217.55,129.79 0 top
F48  500mA  [PTC-1206-WIDE]  260.73,129.79 0 top
F49  500mA  [PTC-1206-WIDE]  174.37,150.62 0 top
F50  500mA  [PTC-1206-WIDE]  217.55,150.62 0 top
F51  500mA  [PTC-1206-WIDE]  260.73,150.62 0 top
F52  500mA  [PTC-1206-WIDE]  174.37,171.45 0 top
F53  500mA  [PTC-1206-WIDE]  217.55,171.45 0 top
F54  500mA  [PTC-1206-WIDE]  260.73,171.45 0 top
F55  500mA  [PTC-1206-WIDE]  174.37,192.28 0 top
F56  500mA  [PTC-1206-WIDE]  217.55,192.28 0 top
F57  500mA  [PTC-1206-WIDE]  260.73,192.28 0 top
F58  500mA  [PTC-1206-WIDE]  174.37,213.11 0 top
F59  500mA  [PTC-1206-WIDE]  217.55,213.11 0 top
F60  500mA  [PTC-1206-WIDE]  260.73,213.11 0 top
FID1  FIDUCIAL1X2  [FIDUCIAL-1X2]  26.42,8 0 top
FID2  FIDUCIAL1X2  [FIDUCIAL-1X2]  46.86,24.51 0 top
FID3  FIDUCIAL1X2  [FIDUCIAL-1X2]  69.6,8 0 top
FID4  FIDUCIAL1X2  [FIDUCIAL-1X2]  90.04,24.51 0 top
FID5  FIDUCIAL1X2  [FIDUCIAL-1X2]  112.78,8 0 top
FID6  FIDUCIAL1X2  [FIDUCIAL-1X2]  133.22,24.51 0 top
FID7  FIDUCIAL1X2  [FIDUCIAL-1X2]  26.42,28.83 0 top
FID8  FIDUCIAL1X2  [FIDUCIAL-1X2]  46.86,45.34 0 top
FID9  FIDUCIAL1X2  [FIDUCIAL-1X2]  69.6,28.83 0 top
FID10  FIDUCIAL1X2  [FIDUCIAL-1X2]  90.04,45.34 0 top
FID11  FIDUCIAL1X2  [FIDUCIAL-1X2]  112.78,28.83 0 top
FID12  FIDUCIAL1X2  [FIDUCIAL-1X2]  133.22,45.34 0 top
FID13  FIDUCIAL1X2  [FIDUCIAL-1X2]  26.42,49.66 0 top
FID14  FIDUCIAL1X2  [FIDUCIAL-1X2]  46.86,66.17 0 top
FID15  FIDUCIAL1X2  [FIDUCIAL-1X2]  69.6,49.66 0 top
FID16  FIDUCIAL1X2  [FIDUCIAL-1X2]  90.04,66.17 0 top
FID17  FIDUCIAL1X2  [FIDUCIAL-1X2]  112.78,49.66 0 top
FID18  FIDUCIAL1X2  [FIDUCIAL-1X2]  133.22,66.17 0 top
FID19  FIDUCIAL1X2  [FIDUCIAL-1X2]  26.42,70.48 0 top
FID20  FIDUCIAL1X2  [FIDUCIAL-1X2]  46.86,87 0 top
FID21  FIDUCIAL1X2  [FIDUCIAL-1X2]  69.6,70.48 0 top
FID22  FIDUCIAL1X2  [FIDUCIAL-1X2]  90.04,87 0 top
FID23  FIDUCIAL1X2  [FIDUCIAL-1X2]  112.78,70.48 0 top
FID24  FIDUCIAL1X2  [FIDUCIAL-1X2]  133.22,87 0 top
FID25  FIDUCIAL1X2  [FIDUCIAL-1X2]  26.42,91.31 0 top
FID26  FIDUCIAL1X2  [FIDUCIAL-1X2]  46.86,107.82 0 top
FID27  FIDUCIAL1X2  [FIDUCIAL-1X2]  69.6,91.31 0 top
FID28  FIDUCIAL1X2  [FIDUCIAL-1X2]  90.04,107.82 0 top
FID29  FIDUCIAL1X2  [FIDUCIAL-1X2]  112.78,91.31 0 top
FID30  FIDUCIAL1X2  [FIDUCIAL-1X2]  133.22,107.82 0 top
FID31  FIDUCIAL1X2  [FIDUCIAL-1X2]  169.67,8 0 top
FID32  FIDUCIAL1X2  [FIDUCIAL-1X2]  190.12,24.51 0 top
FID33  FIDUCIAL1X2  [FIDUCIAL-1X2]  212.85,8 0 top
FID34  FIDUCIAL1X2  [FIDUCIAL-1X2]  233.3,24.51 0 top
FID35  FIDUCIAL1X2  [FIDUCIAL-1X2]  256.03,8 0 top
FID36  FIDUCIAL1X2  [FIDUCIAL-1X2]  276.48,24.51 0 top
FID37  FIDUCIAL1X2  [FIDUCIAL-1X2]  169.67,28.83 0 top
FID38  FIDUCIAL1X2  [FIDUCIAL-1X2]  190.12,45.34 0 top
FID39  FIDUCIAL1X2  [FIDUCIAL-1X2]  212.85,28.83 0 top
FID40  FIDUCIAL1X2  [FIDUCIAL-1X2]  233.3,45.34 0 top
FID41  FIDUCIAL1X2  [FIDUCIAL-1X2]  256.03,28.83 0 top
FID42  FIDUCIAL1X2  [FIDUCIAL-1X2]  276.48,45.34 0 top
FID43  FIDUCIAL1X2  [FIDUCIAL-1X2]  169.67,49.66 0 top
FID44  FIDUCIAL1X2  [FIDUCIAL-1X2]  190.12,66.17 0 top
FID45  FIDUCIAL1X2  [FIDUCIAL-1X2]  212.85,49.66 0 top
FID46  FIDUCIAL1X2  [FIDUCIAL-1X2]  233.3,66.17 0 top
FID47  FIDUCIAL1X2  [FIDUCIAL-1X2]  256.03,49.66 0 top
FID48  FIDUCIAL1X2  [FIDUCIAL-1X2]  276.48,66.17 0 top
FID49  FIDUCIAL1X2  [FIDUCIAL-1X2]  169.67,70.48 0 top
FID50  FIDUCIAL1X2  [FIDUCIAL-1X2]  190.12,87 0 top
FID51  FIDUCIAL1X2  [FIDUCIAL-1X2]  212.85,70.48 0 top
FID52  FIDUCIAL1X2  [FIDUCIAL-1X2]  233.3,87 0 top
FID53  FIDUCIAL1X2  [FIDUCIAL-1X2]  256.03,70.48 0 top
FID54  FIDUCIAL1X2  [FIDUCIAL-1X2]  276.48,87 0 top
FID55  FIDUCIAL1X2  [FIDUCIAL-1X2]  169.67,91.31 0 top
FID56  FIDUCIAL1X2  [FIDUCIAL-1X2]  190.12,107.82 0 top
FID57  FIDUCIAL1X2  [FIDUCIAL-1X2]  212.85,91.31 0 top
FID58  FIDUCIAL1X2  [FIDUCIAL-1X2]  233.3,107.82 0 top
FID59  FIDUCIAL1X2  [FIDUCIAL-1X2]  256.03,91.31 0 top
FID60  FIDUCIAL1X2  [FIDUCIAL-1X2]  276.48,107.82 0 top
FID61  FIDUCIAL1X2  [FIDUCIAL-1X2]  26.42,125.86 0 top
FID62  FIDUCIAL1X2  [FIDUCIAL-1X2]  46.86,142.37 0 top
FID63  FIDUCIAL1X2  [FIDUCIAL-1X2]  69.6,125.86 0 top
FID64  FIDUCIAL1X2  [FIDUCIAL-1X2]  90.04,142.37 0 top
FID65  FIDUCIAL1X2  [FIDUCIAL-1X2]  112.78,125.86 0 top
FID66  FIDUCIAL1X2  [FIDUCIAL-1X2]  133.22,142.37 0 top
FID67  FIDUCIAL1X2  [FIDUCIAL-1X2]  26.42,146.69 0 top
FID68  FIDUCIAL1X2  [FIDUCIAL-1X2]  46.86,163.19 0 top
FID69  FIDUCIAL1X2  [FIDUCIAL-1X2]  69.6,146.69 0 top
FID70  FIDUCIAL1X2  [FIDUCIAL-1X2]  90.04,163.19 0 top
FID71  FIDUCIAL1X2  [FIDUCIAL-1X2]  112.78,146.69 0 top
FID72  FIDUCIAL1X2  [FIDUCIAL-1X2]  133.22,163.19 0 top
FID73  FIDUCIAL1X2  [FIDUCIAL-1X2]  26.42,167.51 0 top
FID74  FIDUCIAL1X2  [FIDUCIAL-1X2]  46.86,184.02 0 top
FID75  FIDUCIAL1X2  [FIDUCIAL-1X2]  69.6,167.51 0 top
FID76  FIDUCIAL1X2  [FIDUCIAL-1X2]  90.04,184.02 0 top
FID77  FIDUCIAL1X2  [FIDUCIAL-1X2]  112.78,167.51 0 top
FID78  FIDUCIAL1X2  [FIDUCIAL-1X2]  133.22,184.02 0 top
FID79  FIDUCIAL1X2  [FIDUCIAL-1X2]  26.42,188.34 0 top
FID80  FIDUCIAL1X2  [FIDUCIAL-1X2]  46.86,204.85 0 top
FID81  FIDUCIAL1X2  [FIDUCIAL-1X2]  69.6,188.34 0 top
FID82  FIDUCIAL1X2  [FIDUCIAL-1X2]  90.04,204.85 0 top
FID83  FIDUCIAL1X2  [FIDUCIAL-1X2]  112.78,188.34 0 top
FID84  FIDUCIAL1X2  [FIDUCIAL-1X2]  133.22,204.85 0 top
FID85  FIDUCIAL1X2  [FIDUCIAL-1X2]  26.42,209.17 0 top
FID86  FIDUCIAL1X2  [FIDUCIAL-1X2]  46.86,225.68 0 top
FID87  FIDUCIAL1X2  [FIDUCIAL-1X2]  69.6,209.17 0 top
FID88  FIDUCIAL1X2  [FIDUCIAL-1X2]  90.04,225.68 0 top
FID89  FIDUCIAL1X2  [FIDUCIAL-1X2]  112.78,209.17 0 top
FID90  FIDUCIAL1X2  [FIDUCIAL-1X2]  133.22,225.68 0 top
FID91  FIDUCIAL1X2  [FIDUCIAL-1X2]  169.67,125.86 0 top
FID92  FIDUCIAL1X2  [FIDUCIAL-1X2]  190.12,142.37 0 top
FID93  FIDUCIAL1X2  [FIDUCIAL-1X2]  212.85,125.86 0 top
FID94  FIDUCIAL1X2  [FIDUCIAL-1X2]  233.3,142.37 0 top
FID95  FIDUCIAL1X2  [FIDUCIAL-1X2]  256.03,125.86 0 top
FID96  FIDUCIAL1X2  [FIDUCIAL-1X2]  276.48,142.37 0 top
FID97  FIDUCIAL1X2  [FIDUCIAL-1X2]  169.67,146.69 0 top
FID98  FIDUCIAL1X2  [FIDUCIAL-1X2]  190.12,163.19 0 top
FID99  FIDUCIAL1X2  [FIDUCIAL-1X2]  212.85,146.69 0 top
FID100  FIDUCIAL1X2  [FIDUCIAL-1X2]  233.3,163.19 0 top
FID101  FIDUCIAL1X2  [FIDUCIAL-1X2]  256.03,146.69 0 top
FID102  FIDUCIAL1X2  [FIDUCIAL-1X2]  276.48,163.19 0 top
FID103  FIDUCIAL1X2  [FIDUCIAL-1X2]  169.67,167.51 0 top
FID104  FIDUCIAL1X2  [FIDUCIAL-1X2]  190.12,184.02 0 top
FID105  FIDUCIAL1X2  [FIDUCIAL-1X2]  212.85,167.51 0 top
FID106  FIDUCIAL1X2  [FIDUCIAL-1X2]  233.3,184.02 0 top
FID107  FIDUCIAL1X2  [FIDUCIAL-1X2]  256.03,167.51 0 top
FID108  FIDUCIAL1X2  [FIDUCIAL-1X2]  276.48,184.02 0 top
FID109  FIDUCIAL1X2  [FIDUCIAL-1X2]  169.67,188.34 0 top
FID110  FIDUCIAL1X2  [FIDUCIAL-1X2]  190.12,204.85 0 top
FID111  FIDUCIAL1X2  [FIDUCIAL-1X2]  212.85,188.34 0 top
FID112  FIDUCIAL1X2  [FIDUCIAL-1X2]  233.3,204.85 0 top
FID113  FIDUCIAL1X2  [FIDUCIAL-1X2]  256.03,188.34 0 top
FID114  FIDUCIAL1X2  [FIDUCIAL-1X2]  276.48,204.85 0 top
FID115  FIDUCIAL1X2  [FIDUCIAL-1X2]  169.67,209.17 0 top
FID116  FIDUCIAL1X2  [FIDUCIAL-1X2]  190.12,225.68 0 top
FID117  FIDUCIAL1X2  [FIDUCIAL-1X2]  212.85,209.17 0 top
FID118  FIDUCIAL1X2  [FIDUCIAL-1X2]  233.3,225.68 0 top
FID119  FIDUCIAL1X2  [FIDUCIAL-1X2]  256.03,209.17 0 top
FID120  FIDUCIAL1X2  [FIDUCIAL-1X2]  276.48,225.68 0 top
J1  MICROVIEW-16ND  [MV-DIP16-NODIMENSION]  30.48,8.13 0 top
J2  MICROVIEW-16ND  [MV-DIP16-NODIMENSION]  73.66,8.13 0 top
J3  MICROVIEW-16ND  [MV-DIP16-NODIMENSION]  116.84,8.13 0 top
J4  MICROVIEW-16ND  [MV-DIP16-NODIMENSION]  30.48,28.96 0 top
J5  MICROVIEW-16ND  [MV-DIP16-NODIMENSION]  73.66,28.96 0 top
J6  MICROVIEW-16ND  [MV-DIP16-NODIMENSION]  116.84,28.96 0 top
J7  MICROVIEW-16ND  [MV-DIP16-NODIMENSION]  30.48,49.78 0 top
J8  MICROVIEW-16ND  [MV-DIP16-NODIMENSION]  73.66,49.78 0 top
J9  MICROVIEW-16ND  [MV-DIP16-NODIMENSION]  116.84,49.78 0 top
J10  MICROVIEW-16ND  [MV-DIP16-NODIMENSION]  30.48,70.61 0 top
J11  MICROVIEW-16ND  [MV-DIP16-NODIMENSION]  73.66,70.61 0 top
J12  MICROVIEW-16ND  [MV-DIP16-NODIMENSION]  116.84,70.61 0 top
J13  MICROVIEW-16ND  [MV-DIP16-NODIMENSION]  30.48,91.44 0 top
J14  MICROVIEW-16ND  [MV-DIP16-NODIMENSION]  73.66,91.44 0 top
J15  MICROVIEW-16ND  [MV-DIP16-NODIMENSION]  116.84,91.44 0 top
J16  MICROVIEW-16ND  [MV-DIP16-NODIMENSION]  173.74,8.13 0 top
J17  MICROVIEW-16ND  [MV-DIP16-NODIMENSION]  216.92,8.13 0 top
J18  MICROVIEW-16ND  [MV-DIP16-NODIMENSION]  260.1,8.13 0 top
J19  MICROVIEW-16ND  [MV-DIP16-NODIMENSION]  173.74,28.96 0 top
J20  MICROVIEW-16ND  [MV-DIP16-NODIMENSION]  216.92,28.96 0 top
J21  MICROVIEW-16ND  [MV-DIP16-NODIMENSION]  260.1,28.96 0 top
J22  MICROVIEW-16ND  [MV-DIP16-NODIMENSION]  173.74,49.78 0 top
J23  MICROVIEW-16ND  [MV-DIP16-NODIMENSION]  216.92,49.78 0 top
J24  MICROVIEW-16ND  [MV-DIP16-NODIMENSION]  260.1,49.78 0 top
J25  MICROVIEW-16ND  [MV-DIP16-NODIMENSION]  173.74,70.61 0 top
J26  MICROVIEW-16ND  [MV-DIP16-NODIMENSION]  216.92,70.61 0 top
J27  MICROVIEW-16ND  [MV-DIP16-NODIMENSION]  260.1,70.61 0 top
J28  MICROVIEW-16ND  [MV-DIP16-NODIMENSION]  173.74,91.44 0 top
J29  MICROVIEW-16ND  [MV-DIP16-NODIMENSION]  216.92,91.44 0 top
J30  MICROVIEW-16ND  [MV-DIP16-NODIMENSION]  260.1,91.44 0 top
J31  MICROVIEW-16ND  [MV-DIP16-NODIMENSION]  30.48,125.98 0 top
J32  MICROVIEW-16ND  [MV-DIP16-NODIMENSION]  73.66,125.98 0 top
J33  MICROVIEW-16ND  [MV-DIP16-NODIMENSION]  116.84,125.98 0 top
J34  MICROVIEW-16ND  [MV-DIP16-NODIMENSION]  30.48,146.81 0 top
J35  MICROVIEW-16ND  [MV-DIP16-NODIMENSION]  73.66,146.81 0 top
J36  MICROVIEW-16ND  [MV-DIP16-NODIMENSION]  116.84,146.81 0 top
J37  MICROVIEW-16ND  [MV-DIP16-NODIMENSION]  30.48,167.64 0 top
J38  MICROVIEW-16ND  [MV-DIP16-NODIMENSION]  73.66,167.64 0 top
J39  MICROVIEW-16ND  [MV-DIP16-NODIMENSION]  116.84,167.64 0 top
J40  MICROVIEW-16ND  [MV-DIP16-NODIMENSION]  30.48,188.47 0 top
J41  MICROVIEW-16ND  [MV-DIP16-NODIMENSION]  73.66,188.47 0 top
J42  MICROVIEW-16ND  [MV-DIP16-NODIMENSION]  116.84,188.47 0 top
J43  MICROVIEW-16ND  [MV-DIP16-NODIMENSION]  30.48,209.3 0 top
J44  MICROVIEW-16ND  [MV-DIP16-NODIMENSION]  73.66,209.3 0 top
J45  MICROVIEW-16ND  [MV-DIP16-NODIMENSION]  116.84,209.3 0 top
J46  MICROVIEW-16ND  [MV-DIP16-NODIMENSION]  173.74,125.98 0 top
J47  MICROVIEW-16ND  [MV-DIP16-NODIMENSION]  216.92,125.98 0 top
J48  MICROVIEW-16ND  [MV-DIP16-NODIMENSION]  260.1,125.98 0 top
J49  MICROVIEW-16ND  [MV-DIP16-NODIMENSION]  173.74,146.81 0 top
J50  MICROVIEW-16ND  [MV-DIP16-NODIMENSION]  216.92,146.81 0 top
J51  MICROVIEW-16ND  [MV-DIP16-NODIMENSION]  260.1,146.81 0 top
J52  MICROVIEW-16ND  [MV-DIP16-NODIMENSION]  173.74,167.64 0 top
J53  MICROVIEW-16ND  [MV-DIP16-NODIMENSION]  216.92,167.64 0 top
J54  MICROVIEW-16ND  [MV-DIP16-NODIMENSION]  260.1,167.64 0 top
J55  MICROVIEW-16ND  [MV-DIP16-NODIMENSION]  173.74,188.47 0 top
J56  MICROVIEW-16ND  [MV-DIP16-NODIMENSION]  216.92,188.47 0 top
J57  MICROVIEW-16ND  [MV-DIP16-NODIMENSION]  260.1,188.47 0 top
J58  MICROVIEW-16ND  [MV-DIP16-NODIMENSION]  173.74,209.3 0 top
J59  MICROVIEW-16ND  [MV-DIP16-NODIMENSION]  216.92,209.3 0 top
J60  MICROVIEW-16ND  [MV-DIP16-NODIMENSION]  260.1,209.3 0 top
JP1  USBA-SMD-MALE  [USB-A-SMT-MALE]  21.59,17.02 90 top
JP2  USBA-SMD-MALE  [USB-A-SMT-MALE]  64.77,17.02 90 top
JP3  USBA-SMD-MALE  [USB-A-SMT-MALE]  107.95,17.02 90 top
JP4  USBA-SMD-MALE  [USB-A-SMT-MALE]  21.59,37.85 90 top
JP5  USBA-SMD-MALE  [USB-A-SMT-MALE]  64.77,37.85 90 top
JP6  USBA-SMD-MALE  [USB-A-SMT-MALE]  107.95,37.85 90 top
JP7  USBA-SMD-MALE  [USB-A-SMT-MALE]  21.59,58.67 90 top
JP8  USBA-SMD-MALE  [USB-A-SMT-MALE]  64.77,58.67 90 top
JP9  USBA-SMD-MALE  [USB-A-SMT-MALE]  107.95,58.67 90 top
JP10  USBA-SMD-MALE  [USB-A-SMT-MALE]  21.59,79.5 90 top
JP11  USBA-SMD-MALE  [USB-A-SMT-MALE]  64.77,79.5 90 top
JP12  USBA-SMD-MALE  [USB-A-SMT-MALE]  107.95,79.5 90 top
JP13  USBA-SMD-MALE  [USB-A-SMT-MALE]  21.59,100.33 90 top
JP14  USBA-SMD-MALE  [USB-A-SMT-MALE]  64.77,100.33 90 top
JP15  USBA-SMD-MALE  [USB-A-SMT-MALE]  107.95,100.33 90 top
JP16  USBA-SMD-MALE  [USB-A-SMT-MALE]  164.85,17.02 90 top
JP17  USBA-SMD-MALE  [USB-A-SMT-MALE]  208.03,17.02 90 top
JP18  USBA-SMD-MALE  [USB-A-SMT-MALE]  251.21,17.02 90 top
JP19  USBA-SMD-MALE  [USB-A-SMT-MALE]  164.85,37.85 90 top
JP20  USBA-SMD-MALE  [USB-A-SMT-MALE]  208.03,37.85 90 top
JP21  USBA-SMD-MALE  [USB-A-SMT-MALE]  251.21,37.85 90 top
JP22  USBA-SMD-MALE  [USB-A-SMT-MALE]  164.85,58.67 90 top
JP23  USBA-SMD-MALE  [USB-A-SMT-MALE]  208.03,58.67 90 top
JP24  USBA-SMD-MALE  [USB-A-SMT-MALE]  251.21,58.67 90 top
JP25  USBA-SMD-MALE  [USB-A-SMT-MALE]  164.85,79.5 90 top
JP26  USBA-SMD-MALE  [USB-A-SMT-MALE]  208.03,79.5 90 top
JP27  USBA-SMD-MALE  [USB-A-SMT-MALE]  251.21,79.5 90 top
JP28  USBA-SMD-MALE  [USB-A-SMT-MALE]  164.85,100.33 90 top
JP29  USBA-SMD-MALE  [USB-A-SMT-MALE]  208.03,100.33 90 top
JP30  USBA-SMD-MALE  [USB-A-SMT-MALE]  251.21,100.33 90 top
JP31  USBA-SMD-MALE  [USB-A-SMT-MALE]  21.59,134.87 90 top
JP32  USBA-SMD-MALE  [USB-A-SMT-MALE]  64.77,134.87 90 top
JP33  USBA-SMD-MALE  [USB-A-SMT-MALE]  107.95,134.87 90 top
JP34  USBA-SMD-MALE  [USB-A-SMT-MALE]  21.59,155.7 90 top
JP35  USBA-SMD-MALE  [USB-A-SMT-MALE]  64.77,155.7 90 top
JP36  USBA-SMD-MALE  [USB-A-SMT-MALE]  107.95,155.7 90 top
JP37  USBA-SMD-MALE  [USB-A-SMT-MALE]  21.59,176.53 90 top
JP38  USBA-SMD-MALE  [USB-A-SMT-MALE]  64.77,176.53 90 top
JP39  USBA-SMD-MALE  [USB-A-SMT-MALE]  107.95,176.53 90 top
JP40  USBA-SMD-MALE  [USB-A-SMT-MALE]  21.59,197.36 90 top
JP41  USBA-SMD-MALE  [USB-A-SMT-MALE]  64.77,197.36 90 top
JP42  USBA-SMD-MALE  [USB-A-SMT-MALE]  107.95,197.36 90 top
JP43  USBA-SMD-MALE  [USB-A-SMT-MALE]  21.59,218.19 90 top
JP44  USBA-SMD-MALE  [USB-A-SMT-MALE]  64.77,218.19 90 top
JP45  USBA-SMD-MALE  [USB-A-SMT-MALE]  107.95,218.19 90 top
JP46  USBA-SMD-MALE  [USB-A-SMT-MALE]  164.85,134.87 90 top
JP47  USBA-SMD-MALE  [USB-A-SMT-MALE]  208.03,134.87 90 top
JP48  USBA-SMD-MALE  [USB-A-SMT-MALE]  251.21,134.87 90 top
JP49  USBA-SMD-MALE  [USB-A-SMT-MALE]  164.85,155.7 90 top
JP50  USBA-SMD-MALE  [USB-A-SMT-MALE]  208.03,155.7 90 top
JP51  USBA-SMD-MALE  [USB-A-SMT-MALE]  251.21,155.7 90 top
JP52  USBA-SMD-MALE  [USB-A-SMT-MALE]  164.85,176.53 90 top
JP53  USBA-SMD-MALE  [USB-A-SMT-MALE]  208.03,176.53 90 top
JP54  USBA-SMD-MALE  [USB-A-SMT-MALE]  251.21,176.53 90 top
JP55  USBA-SMD-MALE  [USB-A-SMT-MALE]  164.85,197.36 90 top
JP56  USBA-SMD-MALE  [USB-A-SMT-MALE]  208.03,197.36 90 top
JP57  USBA-SMD-MALE  [USB-A-SMT-MALE]  251.21,197.36 90 top
JP58  USBA-SMD-MALE  [USB-A-SMT-MALE]  164.85,218.19 90 top
JP59  USBA-SMD-MALE  [USB-A-SMT-MALE]  208.03,218.19 90 top
JP60  USBA-SMD-MALE  [USB-A-SMT-MALE]  251.21,218.19 90 top
LOGO1  SFE_LOGO_FLAME.1_INCH  [SFE_LOGO_FLAME_.1]  23.11,6.99 0 top
LOGO2  OSHW-LOGOS  [OSHW-LOGO-S]  45.72,17.02 0 bottom
LOGO3  SFE_LOGO_NAME_FLAME.1_INCH  [SFE_LOGO_NAME_FLAME_.1]  43.18,17.02 0 bottom
LOGO4  OSHW-LOGOS  [OSHW-LOGO-S]  88.9,17.02 0 bottom
LOGO5  SFE_LOGO_FLAME.1_INCH  [SFE_LOGO_FLAME_.1]  66.29,6.99 0 top
LOGO6  SFE_LOGO_NAME_FLAME.1_INCH  [SFE_LOGO_NAME_FLAME_.1]  86.36,17.02 0 bottom
LOGO7  OSHW-LOGOS  [OSHW-LOGO-S]  132.08,17.02 0 bottom
LOGO8  SFE_LOGO_FLAME.1_INCH  [SFE_LOGO_FLAME_.1]  109.47,6.99 0 top
LOGO9  SFE_LOGO_NAME_FLAME.1_INCH  [SFE_LOGO_NAME_FLAME_.1]  129.54,17.02 0 bottom
LOGO10  OSHW-LOGOS  [OSHW-LOGO-S]  45.72,37.85 0 bottom
LOGO11  SFE_LOGO_FLAME.1_INCH  [SFE_LOGO_FLAME_.1]  23.11,27.81 0 top
LOGO12  SFE_LOGO_NAME_FLAME.1_INCH  [SFE_LOGO_NAME_FLAME_.1]  43.18,37.85 0 bottom
LOGO13  OSHW-LOGOS  [OSHW-LOGO-S]  88.9,37.85 0 bottom
LOGO14  SFE_LOGO_FLAME.1_INCH  [SFE_LOGO_FLAME_.1]  66.29,27.81 0 top
LOGO15  SFE_LOGO_NAME_FLAME.1_INCH  [SFE_LOGO_NAME_FLAME_.1]  86.36,37.85 0 bottom
LOGO16  OSHW-LOGOS  [OSHW-LOGO-S]  132.08,37.85 0 bottom
LOGO17  SFE_LOGO_FLAME.1_INCH  [SFE_LOGO_FLAME_.1]  109.47,27.81 0 top
LOGO18  SFE_LOGO_NAME_FLAME.1_INCH  [SFE_LOGO_NAME_FLAME_.1]  129.54,37.85 0 bottom
LOGO19  OSHW-LOGOS  [OSHW-LOGO-S]  45.72,58.67 0 bottom
LOGO20  SFE_LOGO_FLAME.1_INCH  [SFE_LOGO_FLAME_.1]  23.11,48.64 0 top
LOGO21  SFE_LOGO_NAME_FLAME.1_INCH  [SFE_LOGO_NAME_FLAME_.1]  43.18,58.67 0 bottom
LOGO22  OSHW-LOGOS  [OSHW-LOGO-S]  88.9,58.67 0 bottom
LOGO23  SFE_LOGO_FLAME.1_INCH  [SFE_LOGO_FLAME_.1]  66.29,48.64 0 top
LOGO24  SFE_LOGO_NAME_FLAME.1_INCH  [SFE_LOGO_NAME_FLAME_.1]  86.36,58.67 0 bottom
LOGO25  OSHW-LOGOS  [OSHW-LOGO-S]  132.08,58.67 0 bottom
LOGO26  SFE_LOGO_FLAME.1_INCH  [SFE_LOGO_FLAME_.1]  109.47,48.64 0 top
LOGO27  SFE_LOGO_NAME_FLAME.1_INCH  [SFE_LOGO_NAME_FLAME_.1]  129.54,58.67 0 bottom
LOGO28  OSHW-LOGOS  [OSHW-LOGO-S]  45.72,79.5 0 bottom
LOGO29  SFE_LOGO_FLAME.1_INCH  [SFE_LOGO_FLAME_.1]  23.11,69.47 0 top
LOGO30  SFE_LOGO_NAME_FLAME.1_INCH  [SFE_LOGO_NAME_FLAME_.1]  43.18,79.5 0 bottom
LOGO31  OSHW-LOGOS  [OSHW-LOGO-S]  88.9,79.5 0 bottom
LOGO32  SFE_LOGO_FLAME.1_INCH  [SFE_LOGO_FLAME_.1]  66.29,69.47 0 top
LOGO33  SFE_LOGO_NAME_FLAME.1_INCH  [SFE_LOGO_NAME_FLAME_.1]  86.36,79.5 0 bottom
LOGO34  OSHW-LOGOS  [OSHW-LOGO-S]  132.08,79.5 0 bottom
LOGO35  SFE_LOGO_FLAME.1_INCH  [SFE_LOGO_FLAME_.1]  109.47,69.47 0 top
LOGO36  SFE_LOGO_NAME_FLAME.1_INCH  [SFE_LOGO_NAME_FLAME_.1]  129.54,79.5 0 bottom
LOGO37  OSHW-LOGOS  [OSHW-LOGO-S]  45.72,100.33 0 bottom
LOGO38  SFE_LOGO_FLAME.1_INCH  [SFE_LOGO_FLAME_.1]  23.11,90.3 0 top
LOGO39  SFE_LOGO_NAME_FLAME.1_INCH  [SFE_LOGO_NAME_FLAME_.1]  43.18,100.33 0 bottom
LOGO40  OSHW-LOGOS  [OSHW-LOGO-S]  88.9,100.33 0 bottom
LOGO41  SFE_LOGO_FLAME.1_INCH  [SFE_LOGO_FLAME_.1]  66.29,90.3 0 top
LOGO42  SFE_LOGO_NAME_FLAME.1_INCH  [SFE_LOGO_NAME_FLAME_.1]  86.36,100.33 0 bottom
LOGO43  OSHW-LOGOS  [OSHW-LOGO-S]  132.08,100.33 0 bottom
LOGO44  SFE_LOGO_FLAME.1_INCH  [SFE_LOGO_FLAME_.1]  109.47,90.3 0 top
LOGO45  SFE_LOGO_NAME_FLAME.1_INCH  [SFE_LOGO_NAME_FLAME_.1]  129.54,100.33 0 bottom
LOGO46  OSHW-LOGOS  [OSHW-LOGO-S]  188.98,17.02 0 bottom
LOGO47  SFE_LOGO_FLAME.1_INCH  [SFE_LOGO_FLAME_.1]  166.37,6.99 0 top
LOGO48  SFE_LOGO_NAME_FLAME.1_INCH  [SFE_LOGO_NAME_FLAME_.1]  186.44,17.02 0 bottom
LOGO49  OSHW-LOGOS  [OSHW-LOGO-S]  232.16,17.02 0 bottom
LOGO50  SFE_LOGO_FLAME.1_INCH  [SFE_LOGO_FLAME_.1]  209.55,6.99 0 top
LOGO51  SFE_LOGO_NAME_FLAME.1_INCH  [SFE_LOGO_NAME_FLAME_.1]  229.62,17.02 0 bottom
LOGO52  OSHW-LOGOS  [OSHW-LOGO-S]  275.34,17.02 0 bottom
LOGO53  SFE_LOGO_FLAME.1_INCH  [SFE_LOGO_FLAME_.1]  252.73,6.99 0 top